# EAGLE board pannelized_eps_weather (EAGLE 7.2.0)
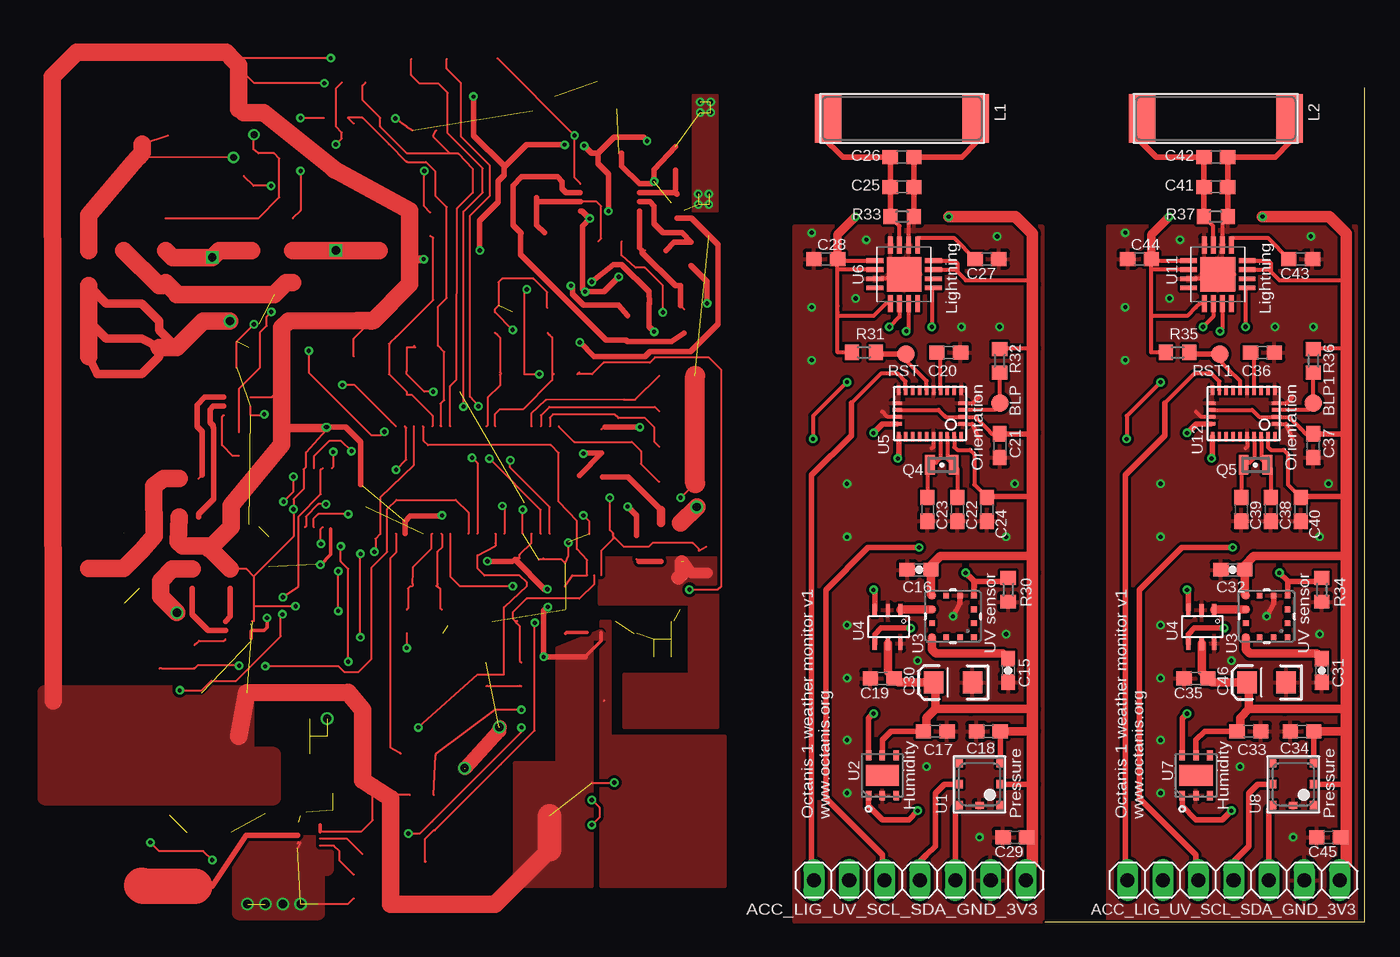
[diagram p0: board, top side]
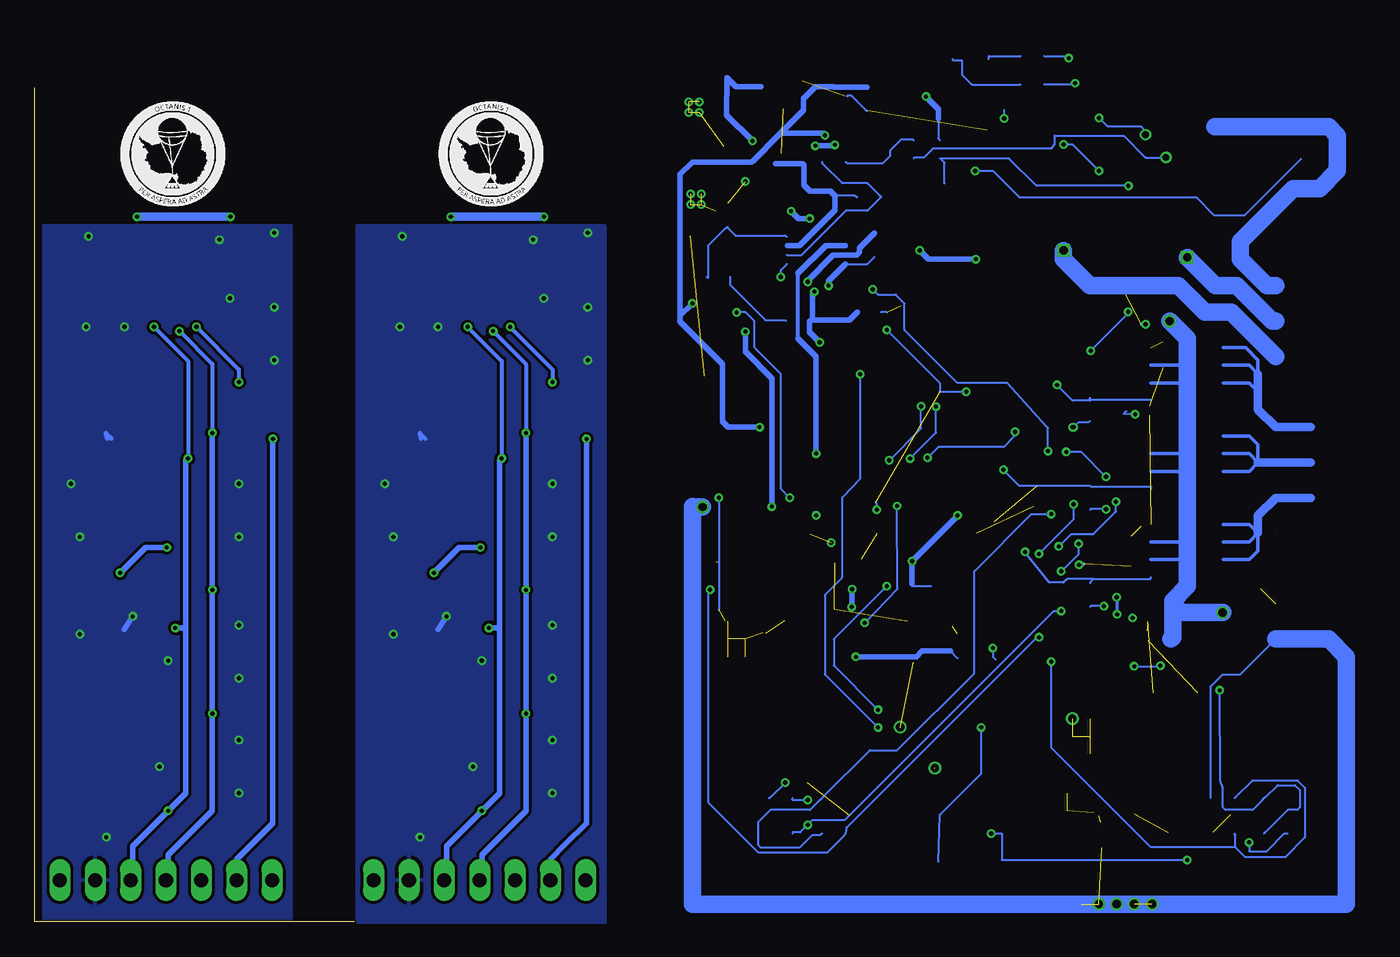
[diagram p1: board, bottom side, seen from below]

Size 23 x 59.94 mm. Coordinates in mm from the lower left corner, seen from the top.
Outline: 0.03,0 0,0 23,0 23,59.94
Copper layers (1*2*15*16): Top 0.035mm / dielectric 0.2mm / layer 2 0.0175mm / dielectric 1.1mm / layer 15 0.0175mm / dielectric 0.2mm / Bottom 0.035mm
Design rules "SeeedStudio_DRU_no_angle_20130527 *": minimum track width 6mil, minimum drill 12mil, track to track 6mil, track to pad 6mil, pad to pad 6mil, via to via 6mil, smd to smd 0mil, copper to edge 6mil, drill to drill 6mil, minimum pad ring 6mil, minimum via ring 6mil, stop-mask expansion 2mil, vias tented up to drill 25mil, thermal gap 10mil
Net classes: 0 default: clearance 0.205 mm; 1 power: width 0.203 mm, drill 0.305 mm, clearance 0.152 mm

## Footprints (pad centres in the part's own frame; a part is rotated, then mirrored left to right if it is on the bottom)
B1,27 = smd 1.27 x 1.27: TP 0,0
0603-CAP = smd 1.1 x 1: 1 -0.85,0; 2 0.85,0
C0603 = smd 1.1 x 1: 1 -0.85,0; 2 0.85,0
EIA3216 = smd 1.4 x 1.6: A 1.4,0; C -1.4,0
1X07 = drill 1.016 long: 1 -7.62,0; 2 -5.08,0; 3 -2.54,0; 4 0,0; 5 2.54,0; 6 5.08,0; 7 7.62,0
COILCRAFT = smd 1.9 x 3.5: 1 -5.3,0.05; 2 5.3,0.05
FC-12M = smd 0.7 x 1.4: 1 -0.85,0; 2 0.85,0
R0603 = smd 1 x 1.1: 1 -0.85,0; 2 0.85,0
BMP180 = smd 0.6 x 0.5: 1 1.5,1.45; 2 0,1.45; 3 -1.5,1.45; 4 -1.5,-1.45; 5 0,-1.45; 6 1.5,-1.45 | smd 0.5 x 0.6: 7 1.5,0
DFN300X300X110-7N = smd 0.711 x 0.406: 1 -1.448,0.991; 2 -1.448,0; 3 -1.448,-0.991; 4 1.448,-0.991; 5 1.448,0; 6 1.448,0.991 | smd 1.499 x 2.388: 7 0,0
ML8511 = smd 0.4 x 0.4: 1 1.5,-1.5; 2 1.5,-0.5; 3 1.5,0.5; 4 1.5,1.5; 5 0.5,1.5; 6 -0.5,1.5; 7 -1.5,1.5; 8 -1.5,0.5; 9 -1.5,-0.5; 10 -1.5,-1.5; 11 -0.5,-1.5; 12 0.5,-1.5
SOT-23-6 = smd 0.305 x 0.9: SCL 2.45,-0.45; SDA 2.45,1.95; VDD 1.5,1.95; VIN+ 0.6,-0.45; VIN- 0.6,1.95; VSS 1.5,-0.45
BNO055 = smd 0.675 x 0.25: 1 1.663,2.25; 6 -1.665,2.25; 7 -1.665,1.75; 8 -1.665,1.25; 9 -1.665,0.75; 10 -1.665,0.25; 11 -1.665,-0.25; 12 -1.665,-0.75; 13 -1.665,-1.25; 14 -1.665,-1.75; 15 -1.665,-2.25; 20 1.663,-2.25; 21 1.663,-1.75; 22 1.663,-1.25; 23 1.663,-0.75; 24 1.663,-0.25; 25 1.663,0.25; 26 1.663,0.75; 27 1.663,1.25; 28 1.663,1.75 | smd 0.25 x 0.675: 2 0.75,2.362; 3 0.25,2.362; 4 -0.25,2.362; 5 -0.75,2.362; 16 -0.75,-2.362; 17 -0.25,-2.362; 18 0.25,-2.362; 19 0.75,-2.362
16LDMLPQ = smd 1.2 x 0.35: 1 -2.1,0.975; 2 -2.1,0.325; 3 -2.1,-0.325; 4 -2.1,-0.975; 9 2.1,-0.975; 10 2.1,-0.325; 11 2.1,0.325; 12 2.1,0.975 | smd 0.35 x 1.2: 5 -0.975,-2.1; 6 -0.325,-2.1; 7 0.325,-2.1; 8 0.975,-2.1; 13 0.975,2.1; 14 0.325,2.1; 15 -0.325,2.1; 16 -0.975,2.1 | smd 2.5 x 2.5: EXP 0,0

## Placement (x,y rotation side)
BLP  PTR1B1,27  [B1,27]  -3.24,37.27 90 top  (outside the outline)
BLP1  PTR1B1,27  [B1,27]  19.3,37.27 90 top
C15  1n  [0603-CAP]  -2.63,18.07 270 top
C16  100n  [0603-CAP]  -9.03,25.31 180 top  (outside the outline)
C17  100n  [C0603]  -7.86,13.7 0 top  (outside the outline)
C18  100n  [C0603]  -4.05,13.7 180 top  (outside the outline)
C19  100n  [C0603]  -11.67,17.51 180 top  (outside the outline)
C20  100n  [C0603]  -6.89,40.93 180 top  (outside the outline)
C21  100n  [C0603]  -3.24,34.22 270 top  (outside the outline)
C22  12p  [C0603]  -6.28,29.65 270 top  (outside the outline)
C23  12p  [C0603]  -8.42,29.65 270 top  (outside the outline)
C24  120n  [C0603]  -4.15,29.65 270 top  (outside the outline)
C25  670p  [C0603]  -10.25,52.82 0 top  (outside the outline)
C26  270p  [C0603]  -10.25,54.95 0 top  (outside the outline)
C27  10u  [C0603]  -4.15,47.63 180 top  (outside the outline)
C28  1u  [C0603]  -15.73,47.63 0 top  (outside the outline)
C29  100n  [C0603]  -2.14,6.08 180 top
C30  10uF  [EIA3216]  -6.59,17.21 180 top  (outside the outline)
C31  1n  [0603-CAP]  19.91,18.07 270 top
C32  100n  [0603-CAP]  13.51,25.31 180 top
C33  100n  [C0603]  14.68,13.7 0 top
C34  100n  [C0603]  18.49,13.7 180 top
C35  100n  [C0603]  10.87,17.51 180 top
C36  100n  [C0603]  15.65,40.93 180 top
C37  100n  [C0603]  19.3,34.22 270 top
C38  12p  [C0603]  16.26,29.65 270 top
C39  12p  [C0603]  14.12,29.65 270 top
C40  120n  [C0603]  18.39,29.65 270 top
C41  670p  [C0603]  12.29,52.82 0 top
C42  270p  [C0603]  12.29,54.95 0 top
C43  10u  [C0603]  18.39,47.63 180 top
C44  1u  [C0603]  6.81,47.63 0 top
C45  100n  [C0603]  20.4,6.08 180 top
C46  10uF  [EIA3216]  15.95,17.21 180 top
JP4  [1X07]  -8.97,3 180 top
JP5  [1X07]  13.57,3 180 top
L1  100uH  [COILCRAFT]  -10.25,57.69 0 top  (outside the outline)
L2  100uH  [COILCRAFT]  12.29,57.69 0 top
Q4  32.768kHz  [FC-12M]  -7.4,32.84 0 top  (outside the outline)
Q5  32.768kHz  [FC-12M]  15.14,32.84 0 top
R30  10k  [R0603]  -2.63,23.86 270 top
R31  10k  [R0603]  -12.99,40.93 0 top  (outside the outline)
R32  10k  [R0603]  -3.24,40.32 90 top  (outside the outline)
R33  10k  [R0603]  -10.25,50.68 180 top  (outside the outline)
R34  10k  [R0603]  19.91,23.86 270 top
R35  10k  [R0603]  9.55,40.93 0 top
R36  10k  [R0603]  19.3,40.32 90 top
R37  10k  [R0603]  12.29,50.68 180 top
RST  PTR1B1,27  [B1,27]  -9.96,40.81 90 top  (outside the outline)
RST1  PTR1B1,27  [B1,27]  12.58,40.81 90 top
U1  BMP180  [BMP180]  -4.68,9.89 270 top  (outside the outline)
U2  SHT21  [DFN300X300X110-7N]  -11.67,10.53 90 top  (outside the outline)
U3  ML8511-UV-SENSORSMD  [ML8511]  -6.59,21.95 0 top  (outside the outline)
U4  MCP3425  [SOT-23-6]  -9.76,21.95 180 top  (outside the outline)
U5  BNO055A  [BNO055]  -8.24,36.54 270 top  (outside the outline)
U6  AS3935  [16LDMLPQ]  -10.1,46.54 270 top  (outside the outline)
U7  SHT21  [DFN300X300X110-7N]  10.87,10.53 90 top
U8  BMP180  [BMP180]  17.86,9.89 270 top
U9  MCP3425  [SOT-23-6]  12.78,21.95 180 top
U10  ML8511-UV-SENSORSMD  [ML8511]  15.95,21.95 0 top
U11  AS3935  [16LDMLPQ]  12.44,46.54 270 top
U12  BNO055A  [BNO055]  14.3,36.54 270 top

## Library data of the parts
BLP BLP1 RST RST1 = testpad
C15 C31 = SparkFun-Capacitors; PROD_ID: CAP-07886
C16 C32 = SparkFun-Capacitors; PROD_ID: CAP-00810
C17-C29 C33-C45 R31 R32 R35 R36 = rcl
C30 C46 = SparkFun-Retired; PROD_ID: CAP-00811
JP4 JP5 = pinhead
L1 L2 U6 U11 = AS3935
Q4 Q5 = crystal; URL: http://www.mouser.ch/ProductDetail/ECS/ECS-327-125-12-TR/?qs=sGAEpiMZZMsBj6bBr9Q9adKxTNdvE4KvM1b8HDkgjuY%3d
R30 R33 R34 R37 = resistor
U1 U8 = SparkFun-Sensors
U2 U7 = SENSIRION-SHT21; MPN: SHT21; OC_FARNELL: 1855468; OC_NEWARK: 20T1172; PACKAGE: DFN-6; SUPPLIER: SENSIRION
U3 U10 = SparkFun-Sensors; PROD_ID: IC-11927
U4 U9 = phMeter
U5 U12 = BNO055

## Nets
+3V1 [power]: C32.1 C33.1 C34.1 C35.1 C37.1 C40.1 C44.2 C45.1 C46.A JP5.1 R35.1 R36.2 U7.5 U8.2 U8.3 U9.VDD U10.7 U11.5 U11.6 U11.9 U11.15 U11.16 U12.3 U12.17 U12.28
+3V3 [power]: C16.1 C17.1 C18.1 C19.1 C21.1 C24.1 C28.2 C29.1 C30.A JP4.1 R31.1 R32.2 U1.2 U1.3 U2.5 U3.7 U4.VDD U5.3 U5.17 U5.28 U6.5 U6.6 U6.9 U6.15 U6.16
ACCEL_IRQ: JP4.7 U5.14
ACCEL_IRQ1: JP5.7 U12.14
ACCEL_N_BOOTLD: BLP.TP R32.1 U5.4
ACCEL_N_BOOTLD1: BLP1.TP R36.1 U12.4
ACCEL_N_RST: R31.2 RST.TP U5.11
ACCEL_N_RST1: R35.2 RST1.TP U12.11
GND1: C15.2 C16.2 C17.2 C18.2 C19.2 C20.1 C21.2 C22.2 C23.2 C24.2 C25.2 C26.2 C27.1 C28.1 C29.2 C30.C JP4.2 L1.2 R30.2 R33.1 U1.7 U2.2 U3.5 U4.VIN- U4.VSS U5.2 U5.5 U5.6 U5.10 U5.15 U5.16 U5.18 U5.25 U6.2 U6.4 U6.7 U6.EXP
GND2: C31.2 C32.2 C33.2 C34.2 C35.2 C36.1 C37.2 C38.2 C39.2 C40.2 C41.2 C42.2 C43.1 C44.1 C45.2 C46.C JP5.2 L2.2 R34.2 R37.1 U7.2 U8.7 U9.VIN- U9.VSS U10.5 U11.2 U11.4 U11.7 U11.EXP U12.2 U12.5 U12.6 U12.10 U12.15 U12.16 U12.18 U12.25
LIGHTNING_IRQ: JP4.6 U6.10
LIGHTNING_IRQ1: JP5.6 U11.10
N$27: C15.1 U3.10
N$36: U3.8 U4.VIN+
N$39: C25.1 C26.1 L1.1 R33.2 U6.3
N$41: C27.2 U6.1
N$42: C20.2 U5.9
N$43: C22.1 Q4.2 U5.27
N$44: C31.1 U10.10
N$46: U9.VIN+ U10.8
N$47: C41.1 C42.1 L2.1 R37.2 U11.3
N$49: C43.2 U11.1
N$51: C36.2 U12.9
N$52: C39.1 Q5.1 U12.26
N$53: C38.1 Q5.2 U12.27
N$73: C23.1 Q4.1 U5.26
SCL: JP4.4 U1.5 U2.6 U4.SCL U5.19 U6.11
SCL1: JP5.4 U7.6 U8.5 U9.SCL U11.11 U12.19
SDA: JP4.3 U1.6 U2.1 U4.SDA U5.20 U6.13
SDA1: JP5.3 U7.1 U8.6 U9.SDA U11.13 U12.20
UV_EN: JP4.5 R30.1 U3.4
UV_EN1: JP5.5 R34.1 U10.4

## Tracks (layer width: path | path; a pad name or v marks a point on that pad's centre or on a via)
+3V1  (via drill 0.3)
  Top 0.305: U12.17 14.91,36.79 15.34,36.36 15.41,36.29 | 15.41,36.29 U12.3 | U12.28 16.05,34.13 16.26,33.92 17.17,33.92 17.48,33.61 17.48,31.42 C40.1 | 21.67,49.46 21.67,45.81 | 21.67,45.81 21.67,41.23 | 21.67,41.23 21.67,35.14 21.67,30.64 21.74,30.57 | 15.41,36.29 17.55,36.29 18.39,35.44 18.76,35.07 C37.1 | R36.2 arc-90 19.37,41.23 21.67,41.23 | U11.16 16.07,47.52 16.26,47.33 16.26,46.72 | 16.26,46.72 16.87,46.11 21.36,46.11 21.67,45.81 | U11.15 16.11,46.87 16.26,46.72 | U11.5 7.78,47.52 C44.2 7.66,46.87 | U11.6 7.66,46.87 | R35.1 7.66,40.93 7.66,43.55 | 7.66,43.55 7.66,43.81 | 7.66,43.81 7.66,44.28 | 7.66,44.28 7.66,46.87 | 7.66,43.81 7.66,44.28 | U11.9 11.13,44.44 10.87,44.18 10.24,43.55 7.66,43.55
  Top 0.406: U8.2 21.67,9.89 | C45.1 21.67,6.08 | C34.1 19.34,11.43 U8.3 | U7.5 10.87,13.06 11.51,13.7 C33.1 | 21.74,30.57 18.45,30.57 C40.1 | C37.1 21.6,35.07 21.67,35.14
  Top 0.61: 21.67,13.7 C34.1 | 21.67,15.3 17.22,15.3 14.68,15.3 | 14.68,15.3 14.05,14.66 14.05,13.91 C33.1 | 14.68,15.3 14.68,17.38 C46.A 12.03,17.2 C35.1 11.28,17.95 U9.VDD | 21.67,25.08 21.74,26.22 21.67,26.3 15.04,26.3 14.36,25.62 C32.1 14.36,23.54 U10.7 | C44.2 7.66,49.4 v8.94,50.68
  Top 0.813: JP5.1 21.03,3.16 21.03,3.54 21.67,4.17 21.67,6.08 21.67,9.89 21.67,13.7 21.67,15.3 21.67,25.08 21.67,35.14 21.67,41.23 21.67,45.81 21.67,49.46 20.45,50.68 v15.65,50.68
  Bottom 0.61: v8.94,50.68 v15.65,50.68
+3V3  (via drill 0.3)
  Top 0.305: U5.17 -7.63,36.79 -7.2,36.36 -7.13,36.29 | -7.13,36.29 U5.3 | U5.28 -6.49,34.13 -6.28,33.92 -5.37,33.92 -5.06,33.61 -5.06,31.42 C24.1 | -0.87,49.46 -0.87,45.81 | -0.87,45.81 -0.87,41.23 | -0.87,41.23 -0.87,35.14 -0.87,30.64 -0.8,30.57 | -7.13,36.29 -4.99,36.29 -4.15,35.44 -3.78,35.07 C21.1 | R32.2 arc-90 -3.17,41.23 -0.87,41.23 | U6.16 -6.47,47.52 -6.28,47.33 -6.28,46.72 | -6.28,46.72 -5.67,46.11 -1.18,46.11 -0.87,45.81 | U6.15 -6.43,46.87 -6.28,46.72 | U6.5 -14.76,47.52 C28.2 -14.88,46.87 | U6.6 -14.88,46.87 | R31.1 -14.88,40.93 -14.88,43.55 | -14.88,43.55 -14.88,43.81 | -14.88,43.81 -14.88,44.28 | -14.88,44.28 -14.88,46.87 | -14.88,43.81 -14.88,44.28 | U6.9 -11.41,44.44 -11.67,44.18 -12.3,43.55 -14.88,43.55
  Top 0.406: U1.2 -0.87,9.89 | C29.1 -0.87,6.08 | C18.1 -3.2,11.43 U1.3 | U2.5 -11.67,13.06 -11.03,13.7 C17.1 | -0.8,30.57 -4.08,30.57 C24.1 | C21.1 -0.94,35.07 -0.87,35.14
  Top 0.61: -0.87,13.7 C18.1 | -0.87,15.3 -5.32,15.3 -7.86,15.3 | -7.86,15.3 -8.49,14.66 -8.49,13.91 C17.1 | -7.86,15.3 -7.86,17.38 C30.A -10.51,17.2 C19.1 -11.26,17.95 U4.VDD | -0.87,25.08 -0.8,26.22 -0.87,26.3 -7.5,26.3 -8.18,25.62 C16.1 -8.18,23.54 U3.7 | C28.2 -14.88,49.4 v-13.6,50.68
  Top 0.813: JP4.1 -1.51,3.16 -1.51,3.54 -0.87,4.17 -0.87,6.08 -0.87,9.89 -0.87,13.7 -0.87,15.3 -0.87,25.08 -0.87,35.14 -0.87,41.23 -0.87,45.81 -0.87,49.46 -2.09,50.68 v-6.89,50.68
  Bottom 0.61: v-13.6,50.68 v-6.89,50.68
A_EXT1
  Top 0.152: -34.92,35.6 -33.81,34.49 -29.67,34.49 -29.01,33.83 -29.01,32.92 -27.71,31.62
A_EXT2
  Top 0.152: -35.57,35.6 -35.56,35.61 -35.56,36.25 -35.33,36.47 -30.91,36.47 -30.63,36.2 -28.7,36.2 -28.07,35.56 -28.07,34.52 -27.71,34.16
A_EXT3
  Top 0.152: -36.22,35.6 -36.2,35.62 -36.2,36.4 -35.59,37.01 -28.02,37.01 -27.71,36.7
A_EXT4
  Top 0.152: -36.87,35.6 -36.91,35.64 -36.91,36.55 -35.87,37.49 -30.24,37.53 -29.43,37.53 -27.71,39.24
ACCEL_IRQ
  Top 0.305: U5.14 -9.99,38.85 -10.55,39.41 -11.77,39.41 -13.9,37.27
  Top 0.406: JP4.7 -16.75,3.16 -16.75,32.12 -13.9,34.96 -13.9,37.27
ACCEL_IRQ1
  Top 0.305: U12.14 12.55,38.85 11.99,39.41 10.77,39.41 8.64,37.27
  Top 0.406: JP5.7 5.79,3.16 5.79,32.12 8.64,34.96 8.64,37.27
ACCEL_N_BOOTLD
  Top 0.305: U5.4 -3.72,36.79 arc90 BLP.TP R32.1
ACCEL_N_BOOTLD1
  Top 0.305: U12.4 18.82,36.79 arc90 BLP1.TP R36.1
ACCEL_N_RST
  Top 0.305: U5.11 -8.49,38.87 -9.33,39.71 -9.96,40.34 RST.TP
  Top 0.406: R31.2 -12.02,40.81 RST.TP
ACCEL_N_RST1
  Top 0.305: U12.11 14.05,38.87 13.21,39.71 12.58,40.34 RST1.TP
  Top 0.406: R35.2 10.52,40.81 RST1.TP
BT+  (via drill 0.6)  (3 unrouted)
  Top 0.152: -53.62,5.72 -53.7,5.64 -53.47,5.71 -53.7,5.32 | -49.66,1.69 -50.08,1.27 -52.2,1.27
  Top 1.27: v-24.99,29.82 -26.16,28.65
  Bottom 0.152: -61.51,8.89 -61.51,16.93 -62.36,17.78 -63.63,17.78 -66.17,20.32
  Bottom 1.016: -66.17,20.32 -68.71,20.32
  Bottom 1.27: -66.17,20.32 -69.98,20.32 -71.25,19.05 -71.25,1.27 v-56.01,1.27 v-54.74,1.27 v-53.47,1.27 -24.26,1.27 -24.26,29.84 v-24.99,29.82
  other vias: -57.28,1.27
  pour Top: -52.2,0.64 -52.2,3.81 -51.56,3.81 -51.56,5.71 -56.64,5.71 -57.91,4.45 -57.91,0.64
BT_CHG  (1 unrouted)
  Top 0.762: -24.23,25.07 -25.38,25.07 -25.96,25.91
  Top 1.016: -26.09,25.86 -26.09,24.97 -26.31,24.74
  pour Top: -30.23,13.97 -30.23,17.78 -25.53,17.78 -25.53,22.86 -32,22.86 -32,26.16 -23.5,26.16 -23.5,13.97
CHG_CMD
  Top 0.152: -33.43,51.82 -33.35,51.74 -32.19,51.74 -31.88,51.44 -31.88,49.11 -32.09,48.9
  Top 0.406: -35.96,49.53 -36.51,50.09 -36.51,51.82 | -36.51,51.82 -36.51,52.05 | -36.51,51.82 -36.44,51.74 -33.35,51.74
DISSIP  (via drill 0.5)
  Top 0.152: -62.99,56.52 -64.86,55.88 | v-58.29,54.94 -64.41,54.97 -64.76,54.55 -65.49,54.55
  Top 1.27: -64.86,55.88 -64.86,55.28 -65.49,54.55 -68.71,50.8 -68.71,48.26
  Bottom 0.152: v-58.29,54.94 -56.82,54.94 -55.27,56.49 -50.29,56.52 -50.29,55.88 -50.05,55.58 -41.53,55.58 -40.89,54.94 -40.21,54.94 -40.15,54.87
EN_CHG
  Top 0.152: -44.67,35.6 -44.63,35.56 -44.63,34.57 -44.32,34.27 -35.48,34.27 -34.93,33.71 -34.93,30.2 -33.6,28.83 -33.6,26.8 -32.88,25.99 -32.88,24.91 -33.93,24.91 -34.47,24.09
EN_EXT1  (via drill 0.3)
  Top 0.152: -45.32,35.6 -45.31,35.6 -45.31,32.82 -47.75,30.5 -47.75,27.86 -48.08,27.53 -48.08,26.67 v-48.16,26.59
  Bottom 0.152: -53.09,24.66 -57.2,24.66 -57.22,24.77 | -53.09,24.66 -52.91,24.48 -52.83,24.34 | -53.09,24.66 -51.2,24.66 -50.93,24.38 -49.91,24.38 v-48.16,26.59
EN_EXT2  (via drill 0.3)
  Top 0.152: v-46.61,32.49 -45.87,33.22 -45.87,35.51 -45.97,35.6
  Bottom 0.152: -57.22,31.11 -57.2,31.27 -52.91,31.27 -52.83,31.33 -47.77,31.33 v-46.61,32.49
EN_EXT3  (via drill 0.3 pad 0.25)
  Top 0.152: -46.62,35.6 -46.94,35.92 -49.6,38.58 v-50.47,38.58 -50.44,38.61
  Bottom 0.152: -57.22,37.47 -57.2,37.53 -52.91,37.53 -52.83,37.68 -52.83,37.47 -51.56,37.47 -50.47,38.56 v-50.47,38.58
EN_HEAT1
  Top 0.152: -48.81,60.33 -49.02,60.11 -49.02,59.05 -47.75,57.78 -47.75,57.15 -45.85,55.24 -42.77,55.24 | -43.73,56.9 -43.94,56.52 -43.94,56.41 -42.77,55.24 | -42.72,35.6 -42.72,35.61 -42.72,38.5 -42.26,38.96 -42.22,51.28 -41.1,52.4 -41.1,54.13 -42.13,55.21 arc90 -42.17,55.24 -42.77,55.24
EN_HEAT2
  Top 0.152: -49.66,57.37 -50.08,57.78 -49.02,57.78 -47.12,55.88 -45.85,54.61 -45.82,54.63 -45.8,54.61 -44.45,54.61 -43.79,53.95 -43.79,52.2 -42.98,51.38 -42.98,44.83 -43.6,44.21 -43.6,41.4 -43.16,40.96 -43.16,37.49 -43.41,37.24 -43.41,35.64 -43.37,35.6
EN_HEAT3
  Top 0.152: -44.02,35.6 -43.99,35.62 -43.99,36.37 -45.51,37.88 -45.85,37.88 -45.85,38.1 -47.12,39.37 -47.12,41.53 -46.99,41.66 -46.61,42.04 -43.94,44.7 -43.94,49.16 -44.15,49.29
EXT1+
  Bottom 0.254: -62.42,27.3 -64.26,27.3 -64.9,27.94 | -62.42,28.57 -64.26,28.57 -64.9,27.94 | -62.42,26.04 -64.26,26.04 -64.9,26.67 -64.9,27.94
  Bottom 0.61: -68.71,30.48 -66.17,30.48 -64.9,29.21 -64.9,27.94
EXT2+
  Bottom 0.254: -62.42,32.38 -64.26,32.38 -64.9,33.02 | -62.42,33.66 -64.26,33.66 -64.9,33.02 | -62.42,34.92 -64.26,34.92 -64.9,34.29 -64.9,33.02
  Bottom 0.61: -68.71,33.02 -66.17,33.02 -64.9,33.02
EXT3+
  Bottom 0.254: -62.42,38.73 -64.26,38.73 -64.9,38.1 | -62.42,40.01 -64.26,40.01 -64.9,39.37 -64.9,40.39 -64.01,41.27 -62.42,41.27
  Bottom 0.61: -68.71,35.56 -66.17,35.56 -64.9,36.83 -64.9,38.1 -64.9,39.37
EXT_PW  (via drill 0.6)
  Top 0.152: -61.84,21.98 v-62.36,22.23
  Top 0.61: -68.71,45.72 -67.44,44.45 -64.9,44.45 -63.63,43.18 -63.63,42.55 -62.36,41.27 | -68.71,43.18 -67.44,41.91 -64.9,41.91 -63.63,41.27 -63.63,40.64 -64.9,39.37 -68.07,39.37 -68.71,40.64
  Top 1.27: -62.51,22.38 v-62.36,22.23 -63.53,23.39 -63.53,24.51 -62.69,25.35 -61.27,25.35 | -68.71,40.64 -68.71,43.18 -68.71,45.72 | -63.63,41.27 -62.36,41.27 -60.45,43.18 v-58.55,43.18
  Bottom 0.254: -57.22,26.04 -59.18,26.04 -59.82,26.67 -59.18,27.3 -57.22,27.3 | -57.22,32.38 -59.18,32.38 -59.82,31.75 | -57.22,33.66 -59.18,33.66 -59.82,34.29 | -57.22,38.73 -59.18,38.73 -59.82,38.1 | -57.22,40.01 -59.18,40.01 -59.82,39.37
  Bottom 1.27: -58.76,22.86 -58.76,20.43 -58.65,20.32 | -58.76,22.86 -58.76,23.07 -59.82,24.13 -59.82,26.67 -59.82,31.75 -59.82,34.29 -59.82,38.1 -59.82,39.37 -59.82,41.91 v-58.55,43.18 | v-62.36,22.23 -59.4,22.23 -58.76,22.86
GND  (via drill 0.3, 0.3 pad 0.25, 0.6)  (32 unrouted)
  Top 0.152: -32.73,27.94 -32.72,27.88 -32.72,28.78 v-33.15,29.21 | v-38.23,42.55 -39.5,43.81 -39.5,44.03 -39.24,44.28 -39.24,45.97 -38.99,46.23 -36.73,46.23 -35.75,45.25 -35.75,44.14 | -30.39,55.24 -30.61,55.24 | -29.13,53.04 -29.09,53.09 | -45.85,20.74 v-45.85,19.68 | -45.3,41.4 -45.21,41.27 -45.85,41.27 -45.85,39.59 -45.85,39.37 -44.58,38.1 v-43.94,38.1 | -45.43,56.9 -45.85,57.15 v-46.66,57.73 | -37.52,27.9 v-37.52,29.62 | -57.09,37.06 -57.09,36.41 -56.15,36.41 v-56.08,36.47 | -58.08,39.83 -58.08,41.7 v-56.82,42.95 | v-34.24,27.25 -34.24,26.3 -34.47,25.79 -34.71,26.04 -36.36,26.04 -36.02,26.12 | -25.12,31.52 v-26.16,30.48
  Top 0.254: -57.02,20.37 -57.02,20.9 -56.96,20.95 -56.08,20.95 -55.88,21.16 v-55.88,21.84 | -51.3,28.23 -51.3,26.4 v-52.05,25.65
  Top 0.406: -30.39,55.24 -30.39,54.31 -29.13,53.04 -28.24,53.04 v-28.07,53.21 -28.07,54.06 -26.54,55.71
  Top 1.016: -41.66,11.05 -39.19,13.72 -39.17,13.99
  Top 1.27: -54.03,45.95 -54.51,45.95 -55.37,45.09 -62.36,45.09 -62.36,45.14 -63.17,45.95 -63.4,45.72 -63.63,45.72 -66.17,48.26
  Top 1.422: -25.12,31.52 -25.12,39.24
  Bottom 0.152: -38.23,43.81 -37.81,43.81 | v-45.85,19.68 -45.85,19.05 -46.04,18.86 | v-43.94,38.1 -42.04,38.1 -42.04,38.73 v-38.23,42.55 | v-37.52,29.62 -37.52,30.02 -37.41,30.12 -37.41,30.15 | v-56.82,42.95 -56.49,42.95 -56.46,42.93 | v-56.08,36.47 -55.25,36.5 -55.45,36.7 | v-46.66,57.73 -46.66,58.37 | -35.37,59.33 -35.37,59.37 -35.69,59.37 -36.64,58.42 -36.81,58.28 | v-26.16,30.48 -26.16,22.44
  Bottom 0.254: v-55.88,21.84 -55.88,22.02 -55.86,22.05 | v-52.05,25.65 -52.32,25.65 -52.4,25.73
  other vias: -24.89,51.56 -24.13,51.56 -24.89,52.32 -24.13,52.32 -24.77,58.17 -24,58.17 -24.77,58.93 -24,58.93 -51.56,14.61 -41.68,11.05 -39.19,14
  pour Top: -25.27,51.05 -25.27,59.44 -23.5,59.44 -23.5,51.05
GND1  (via drill 0.3)
  Top 0.305: R33.1 -9.78,50.3 U6.2 | U6.EXP -10.43,46.22 U6.7 | U5.2 -5.2,35.79 -4.76,34.73 | U5.25 -7.99,34.14 -8.11,34.02 | U5.5 -5.15,37.29 -4.76,37.68 | U5.18 -11.29,36.29 -11.67,36.66
  Top 0.406: U3.5 -6.09,22.88 v-6.59,21.95 | C26.2 C25.2 | C25.2 R33.1 | C25.2 C26.2 | L1.2 -4.95,55.98 -5.95,54.98 -9.37,54.98 C26.2
  Bottom 0.305: -4.76,34.73 -4.66,35.14 -5.06,34.73
  Bottom 0.406: v-6.59,21.95 -5.97,21
  other vias: -2.78,20.68 -12.81,49.03 -5.98,42.76 -3.24,42.76 -16.75,40.37 -16.75,44.18 -16.75,49.53 -14.21,21.32 -14.21,17.51 -14.21,13.06 -14.21,9.26 -8.49,11.16 -14.21,31.48 -14.21,27.67 -2.78,27.67 -2.14,31.48 -3.41,49.26 -13.57,44.81 -4.68,6.08 -9.13,18.78
  pour Bottom: -17.97,0 -17.97,50 -0.17,50 -0.17,0
  pour Top: -17.97,0 -17.97,50 -0.17,50 -0.17,0
GND2  (via drill 0.3)
  Top 0.305: R37.1 12.76,50.3 U11.2 | U11.EXP 12.11,46.22 U11.7 | U12.2 17.34,35.79 17.78,34.73 | U12.25 14.55,34.14 14.43,34.02 | U12.5 17.39,37.29 17.78,37.68 | U12.18 11.25,36.29 10.87,36.66
  Top 0.406: U10.5 16.45,22.88 v15.95,21.95 | C42.2 C41.2 | C41.2 R37.1 | C41.2 C42.2 | L2.2 17.59,55.98 16.59,54.98 13.17,54.98 C42.2
  Bottom 0.305: 17.78,34.73 17.88,35.14 17.48,34.73
  Bottom 0.406: v15.95,21.95 16.57,21
  other vias: 19.76,20.68 9.73,49.03 16.56,42.76 19.3,42.76 5.79,40.37 5.79,44.18 5.79,49.53 8.33,21.32 8.33,17.51 8.33,13.06 8.33,9.26 14.05,11.16 8.33,31.48 8.33,27.67 19.76,27.67 20.4,31.48 19.13,49.26 8.97,44.81 17.86,6.08 13.41,18.78
  pour Bottom: 4.57,0 4.57,50 22.37,50 22.37,0
  pour Top: 4.57,0 4.57,50 22.37,50 22.37,0
HEAT1  (via drill 0.6)
  Top 1.27: -54.03,48.26 v-50.93,48.26 -47.83,48.26
  Bottom 1.27: -66.17,40.64 -62.99,43.81 -61.09,43.81 -59.18,45.72 -52.83,45.72 -50.93,47.62 v-50.93,48.26
HEAT2  (via drill 0.6)
  Top 1.27: -63.17,48.26 -62.66,47.75 v-59.82,47.75 -59.31,48.26 -56.97,48.26
  Bottom 1.27: -66.17,43.18 -65.91,43.18 -63.37,45.72 -61.85,45.72 v-59.82,47.75
HEAT3
  Bottom 1.27: -66.17,45.72 -65.53,45.72 -63.63,47.62 -63.63,48.9 -67.44,52.7 -69.34,52.7 -70.61,53.98 -70.61,56.52 -69.98,57.15 -68,57.15 -61.8,57.15
I2C_SCL  (via drill 0.3)
  Top 0.152: v-36.65,21.49 -36.65,13.76 -39.09,11.31 -43.83,6.58 -43.92,6.58 -44.51,5.99 -44.51,4.29 -44.48,4.32 | v-38.97,29.89 -38.82,29.73 -38.82,27.9
  Bottom 0.152: v-36.65,21.49 -39,23.94 v-38.97,29.89
I2C_SDA  (via drill 0.3)
  Top 0.152: v-45.01,13.97 -40.77,17.78 -38.86,17.78 -38.86,22.61 -37.21,24.13 -37.21,24.38 -37.72,24.89 -40.26,24.89 -40.77,25.4 -40.77,26.34 -39.47,27.03 -39.47,27.21 -39.47,27.9
  Bottom 0.152: -41.94,4.32 -42.04,7.7 -45.01,10.67 v-45.01,13.97
I_EXT_PW  (via drill 0.3)
  Top 0.152: -63.63,18.2 -63.45,18.23 -61.13,18.23 -61.09,18.2 -60.87,18.41 v-57.89,18.41 | -41.42,27.9 -41.4,27.91 -41.4,29.41 -42.32,30.33 -46.58,30.33 -47.24,29.67 -47.24,26.59 -48.39,25.45 -48.39,18.87 -49.33,17.93 -50.32,17.93 -50.75,18.36 v-56.01,18.36
  Bottom 0.152: v-56.01,18.36 -57.84,18.36 v-57.89,18.41
I_SC  (via drill 0.3, 0.3 pad 0.25)
  Top 0.152: v-41.15,33.35 -40.77,32.97 -40.77,27.9 | -57.89,35.19 -57.89,38.32 -56.38,39.83 -56.38,42.38 -55.91,42.85 -55.91,43.51 v-55.58,43.84 | v-52.88,41.05 -52.88,39.47 -48.41,35 -47.68,35 v-47.45,35.23
  Bottom 0.152: v-47.45,35.23 -47.45,34.95 -46.63,34.14 -41.94,34.14 v-41.15,33.35 | v-55.58,43.84 -55.58,43.74 v-52.88,41.05
LIGHTNING_IRQ  (via drill 0.3)
  Top 0.305: U6.10 -10.43,43.49 v-11.16,42.76 | v-14.21,38.8 -16.65,36.36 v-16.65,34.71
  Bottom 0.305: v-11.16,42.76 -14.21,39.71 v-14.21,38.8 | v-16.65,34.71 -16.65,29.65
  Bottom 0.406: JP4.6 -14.05,4.5 -15.12,5.57 -16.65,7.1 -16.65,29.65 v-16.65,34.71 -16.65,30.87
LIGHTNING_IRQ1  (via drill 0.3)
  Top 0.305: U11.10 12.11,43.49 v11.38,42.76 | v8.33,38.8 5.89,36.36 v5.89,34.71
  Bottom 0.305: v11.38,42.76 8.33,39.71 v8.33,38.8 | v5.89,34.71 5.89,29.65
  Bottom 0.406: JP5.6 8.49,4.5 7.42,5.57 5.89,7.1 5.89,29.65 v5.89,34.71 5.89,30.87
N$1
  Top 0.152: -58.86,20.3 -58.98,20.19 -60.77,20.19 -60.95,20.01 -61.09,19.9
N$2
  Top 0.152: -57.89,33.49 -58.33,33.49 -59.11,34.27 -59.11,36.29 -58.99,36.41
N$3
  Top 0.254: -32.88,20.81 -34.35,20.81 -34.42,20.74
N$4
  Top 0.152: -37.59,16.93 -37.72,16.98 -40.04,16.98 -40.13,16.93
N$5  (via drill 0.3)
  Top 0.152: -29.97,43.56 -29.97,43.4
  Top 0.406: -29.97,43.56 -30.61,44.32 -31.17,44.32 -32.82,44.32 -33.12,44.32 -33.91,45.11 -33.91,45.59 v-34.04,45.72
  Bottom 0.152: -37.34,47.79 -36.83,47.28 -35.26,47.28 -35.22,47.24
  Bottom 0.406: v-34.04,45.72 -34.04,46.06 -35.26,47.28
N$6
  Top 0.152: -26.42,52.28 -26.54,52.67
  Top 0.406: -26.54,52.67 -26.54,54.01 | -26.42,52.28 -26.53,52.39 -29.13,52.39
N$7
  Top 0.406: -29.13,51.74 -28.38,51.74 -28.07,51.44 -28.07,50.16 -27.43,49.53 -26.07,49.53 -25.4,48.86 -26.62,48.86 -27.22,48.26
N$8
  Top 0.152: -32.38,24.91 -32.36,24.84 -32.36,24.3 -33.43,23.23 -37.22,23.23 -38.23,22.23 -38.23,21.8 -38.01,21.59 | -37.9,21.62 -38.01,21.59 | -37.59,18.63 -37.72,18.76 -37.72,21.27 -37.9,21.44 -38.01,21.59
N$9
  Top 0.152: -29.13,48.47 -28.92,48.26 -28.7,48.26 | -25.91,44.03 -26.16,44.28
  Top 0.406: -29.13,48.47 -29.13,51.09 | -26.16,44.28 -26.16,45.72 -26.54,45.72 -28.92,48.09 -28.92,48.26
N$10  (via drill 0.3)
  Top 0.152: v-64.26,5.71 -63.63,5.08 -60.45,5.08 v-59.82,4.45 | v-36.32,39.37 -37.38,39.37 -37.38,45.3 v-37.21,45.47 | v-49.81,33.83 -50.55,34.54 -51.44,34.54 -52.52,33.46 -52.52,32.59 | v-45.72,6.35 -44.88,6.35 -44.02,7.21 -37.59,13.64 v-37.59,13.97
  Bottom 0.152: v-64.26,5.71 -64.26,5.08 -65.53,5.08 -66.8,6.35 -67.02,6.35 | v-59.82,4.45 -46.48,4.45 -46.48,6.35 v-45.72,6.35 | v-37.59,13.97 -33.78,17.78 -33.78,23.5 -35.03,24.77 -35.03,30.5 -36.32,31.85 v-36.32,39.37 | v-37.21,45.47 -37.59,45.09 -38.86,45.09 -39.5,44.45 -39.5,42.55 -43.31,38.73 -46.89,38.73 -49.71,35.61 -49.81,35.51 v-49.81,33.83
N$11
  Top 0.406: -25.91,42.33 -26.8,41.7 -29.97,41.7 -30.09,41.81 -31.52,41.81 -31.66,41.95 -34.52,44.81 -37.66,47.94 -37.66,49.53 | -37.62,49.49 -37.66,49.53 | -37.66,49.53 -38.21,50.09 -38.21,52.05 -38.21,52.92 -37.59,53.54 -35,53.54 -34.67,53.21 -34.67,52.7 -34.39,52.43 -33.39,52.43
N$12  (via drill 0.3)
  Top 0.152: -33.43,39.49 -33.57,39.37 -32.51,39.37 -31.7,40.18 -28.37,40.18 -28.37,40.21 -28.02,40.56 -24.13,40.56 -23.24,39.67 -23.24,24.13 -23.5,23.88 v-25.53,23.88 | v-51.66,30.02 -52.19,30.02 -53.09,29.13 -53.09,28.41 -53.17,28.37 | v-49.17,20.45 -49.17,26.43 v-49.16,26.45
  Bottom 0.152: v-51.66,30.02 -51.66,28.95 v-49.16,26.45 | v-25.53,23.88 -25.39,23.76 -25.39,8.58 -28.96,5 -33.97,5 -35.22,6.25 -35.27,6.35 -35.32,6.76 -49.08,20.52 -49.1,20.52 v-49.17,20.45
N$13  (via drill 0.3)
  Top 0.152: v-50.05,29.31 -52.19,29.31 -52.55,28.95 -52.55,28.41 -52.52,28.37
  Bottom 0.152: -33.57,6.35 -33.43,6.25 -32.89,6.25 -32,5.36 -29.14,5.36 -28.96,5.54 -28.96,7.15 -29.86,8.04 -32.72,8.04 -33.43,8.76 -33.57,8.89 -33.61,8.94 -37,12.33 -38.97,12.33 -44.51,17.87 -44.51,25.2 -48.62,29.31 v-50.05,29.31
N$14  (via drill 0.3)
  Top 0.152: v-32.54,6.97 -32,7.5 -32,8.22 v-32.54,8.76 | v-52.02,27.16 -52.02,28.23 -51.87,28.37 | v-50.76,22.34 v-50.76,25.2
  Bottom 0.152: v-32.54,8.76 -31.46,8.76 -31.46,8.89 | -31.46,6.35 -31.46,6.43 -32,6.43 v-32.54,6.97 -32.89,7.33 -35.22,7.33 -50.23,22.34 v-50.76,22.34 | v-52.02,27.16 -52.02,26.45 v-50.76,25.2
N$15  (via drill 0.3)
  Top 0.152: v-54.74,23.33 -53.62,24.12 -53.62,29.13 -52.02,30.74 -52.02,32.52 -51.87,32.59 | v-62.15,16.64 -62.2,16.62 -60.59,16.62 -59.88,17.33 -58.09,17.33 -54.9,20.53 -54.9,21.97 v-54.77,22.1
  Bottom 0.152: -65.32,6.35 -65.42,6.43 -67.03,8.04 -67.74,8.04 -67.92,8.22 -67.92,9.47 -67.56,9.83 -66.31,9.83 -65.42,8.94 -65.32,8.89 -65.24,8.76 -64.52,8.04 -62.56,8.04 -62.38,8.22 -62.38,9.65 -62.18,10.13 v-62.15,16.64
  Bottom 0.203: v-54.74,23.33 -54.74,22.13 v-54.77,22.1
N$16  (via drill 0.3)
  Top 0.152: v-51.12,33.77 -51.12,32.7 -51.22,32.59 | v-53.98,31.99 -53.98,30.91 v-54.7,30.2 | v-50.59,26.98 -50.59,25.91 -50.05,25.38 v-50.05,18.71
  Bottom 0.152: -63.27,5.36 -63.27,6.25 -63.21,6.35 | -63.27,5.36 -63.99,4.65 -66.85,4.65 -68.28,6.08 -68.28,9.65 -67.74,10.19 -64.52,10.19 -63.27,8.94 -63.21,8.89 | v-51.12,33.77 -52.19,33.77 v-53.98,31.99 | v-54.7,30.2 -54.7,29.48 -53.09,27.88 -51.48,27.88 v-50.59,26.98 | v-50.05,18.71 -50.05,12.51 -57.2,5.36 -63.27,5.36
N$17  (via drill 0.3)
  Top 0.406: -29.34,27.77 -29.34,29.21 v-29.97,29.84 | v-32.54,46 -30.99,47.24 -30.4,47.24 -28.45,45.3 -28.41,44.44 -28.42,44.42 -28.42,42.77 v-28.07,42.42
  Bottom 0.406: v-29.97,29.84 -29.97,39.04 -28.07,40.97 v-28.07,42.42 | v-32.54,46 -32.56,46.08 -34.34,47.9 -35.23,47.9 -35.26,47.93 -36.07,47.93 -36.27,48.13 -36.27,48.42 -37.34,49.49
N$18
  Bottom 0.152: -30.98,43.18 -30.93,43.24 -29.5,43.24 -27,45.75 -26.99,46.35
N$19
  Bottom 0.152: -25.29,46.35 -25.36,46.28 -25.39,48.61 -26.64,49.86 -26.8,49.95 -26.82,49.86 -27.35,49.32 -30.93,49.32 -31.04,49.23
N$20
  Bottom 0.152: -34.5,52.18 -35.93,52.18 -36.11,52.07 | -30.21,54.5 -30.19,54.61 | -31.11,48.61 -31.04,48.58
  Bottom 0.406: -30.21,54.5 -32.18,54.5 -32.28,54.4 -32.28,52.93 -32.72,52.5 -34.18,52.5 -34.5,52.18 -34.5,51.16 -31.95,48.62 -31.12,48.62 -31.11,48.61
N$21
  Bottom 0.152: -33.57,54.61 -33.61,54.5 -35.04,53.07 -36.83,53.07 -37.72,52.18 -37.81,52.07 -37.72,52 -36.83,51.11 -35.28,51.11 -32.11,47.93 -31.04,47.93
N$22
  Bottom 0.152: -35.27,54.61 -35.4,54.5 -37.92,54.5 -38.48,55.07 -38.48,55.45 -39.27,56.24 -40.09,56.24 -40.15,56.17
N$23  (via drill 0.3)
  Top 0.152: -31.03,27.94 -31.03,27.52 -31.88,26.67 -31.88,24.91 | -24.33,26.96 -24.85,26.67 -24.85,26.81 -25.27,27.23 -28.19,27.23 -28.47,26.95 -30.23,26.95 -31.03,27.75 -31.03,27.94 | -31.03,27.85 -31.03,27.94 | -31.03,27.94 -31.24,28.16 v-31.24,30.48 | v-27.43,43.81 -27.43,45.72 -28.73,47.02 -29.39,47.02 -30.42,47.92 -30.39,48.9
  Bottom 0.152: v-31.24,30.48 -30.61,31.11 -30.61,39.37 -28.7,41.27 -28.7,43.18 -28.07,43.81 v-27.43,43.81
N$24
  Top 0.152: -31.69,15.88 -31.64,15.9 -31.66,15.91
  pour Top: -31.88,21.59 -31.88,2.54 -22.99,2.54 -22.99,13.34 -31.24,13.34 -31.24,21.59
N$25
  Top 0.152: -49.02,4.87 -50.14,5.98 -52.07,5.98
N$26
  Top 0.406: -61.09,2.54 -59.82,2.54 -57.39,6.24 -53.7,6.24
  Top 2.54: -61.09,2.54 -64.79,2.54 -64.9,2.65
N$27
  Top 0.61: U3.10 -8.09,19.57 -7.81,19.29 -2.99,19.29 C15.1
N$28  (via drill 0.3)
  Top 0.152: -33.43,32.09 -33.49,31.95 | -33.19,33.69 v-33.15,33.66
  Top 0.406: -33.43,32.09 -31.85,33.69 -33.19,33.69
  Bottom 0.305: -31.83,41.91 -31.83,46.61
  Bottom 0.406: v-33.15,33.66 -33.15,40.64 -31.83,41.91 | -31.83,46.61 -33.85,48.58 -35.26,48.58
N$29  (via drill 0.3)
  Top 0.152: v-50.93,55.88 -50.51,56.3 -50.51,56.73 -50.93,57.15 -50.93,59.91 -50.51,60.33 | v-53.47,53.98 -53.47,51.13 -54.03,50.57
  Bottom 0.152: v-50.93,55.88 -51.56,55.88 v-53.47,53.98
N$30
  Top 0.152: -49.66,3.39 -50.67,4.41 -50.67,5.08 -51.08,5.48 -52.07,5.48
N$31  (via drill 0.3, 0.5)
  Top 0.152: -63.17,50.57 -56.49,50.57 -54.99,52.07 -54.99,54.86 -55.37,55.24 -56.52,55.24 -56.86,55.52 -56.86,56.52 v-56.82,56.57 | v-53.47,57.78 -51.78,57.78
  Bottom 0.152: v-53.47,57.78 -54.08,57.17 -56.46,57.17 -56.82,56.82 v-56.82,56.57
N$32
  Top 0.406: -58.52,23.95 -58.52,21.95 -58.86,21.61
N$33
  Top 0.406: -61.27,23.95 -61.27,22.11 -60.12,20.95 -58.86,20.95
N$34
  Top 0.152: -60.53,32.13 -60.81,31.85
  Top 0.406: -58.99,37.71 -60.36,37.71 -60.91,37.16 -60.91,35.61 -60.53,35.23 -60.53,32.13
N$35
  Top 0.406: -60.81,29.1 -60.81,29.31 -59.72,30.4 -59.72,35.51 -59.74,35.53 -59.74,35.66 -59.97,35.89 -59.97,36.83 -59.74,37.06 -58.99,37.06
N$36
  Top 0.61: U3.8 -10.31,22.45 U4.VIN+
N$37  (via drill 0.3)
  Top 0.152: -44.15,50.99 -44.58,51.42 v-44.58,53.98
  Bottom 0.152: v-44.58,53.98 -45.85,53.98 -47.75,52.07 -60.45,52.07 -61.72,50.8 -63.96,50.8 -68,54.84
N$38
  Top 0.152: -29.16,25.9 -29.34,26.07
  Top 0.406: -27.56,25.9 -29.16,25.9
N$39
  Top 0.305: U6.3 -10.43,50.01 R33.2
  Top 0.406: R33.2 C25.1 | C25.1 C26.1 | C26.1 -14.51,54.95 -16.04,56.47 -16.04,57.25 L1.1 | C25.1 C26.1
N$40
  Top 0.152: -31.76,31.98 -31.79,31.95
  Top 0.406: -27.56,29.59 -29.95,31.98 -31.76,31.98
  Top 0.61: -27.56,28.65 -27.56,29.59
N$41
  Top 0.305: U6.1 -9.13,49.16 -7.81,49.16 -6.52,49.16 C27.2
N$42
  Top 0.305: U5.9 -7.49,40.93 C20.2
N$43
  Top 0.305: U5.27 -6.99,33.28 Q4.2 -6.28,32.57 C22.1
N$44
  Top 0.61: U10.10 14.45,19.57 14.73,19.29 19.55,19.29 C31.1
N$45  (via drill 0.3)
  Top 0.152: -57.55,53.59 -57.56,53.6 -56.85,52.9 v-55.59,52.9
  Bottom 0.152: v-55.59,52.9 -48.98,52.9 -47.01,54.86 -42.06,54.86 -42.05,54.87 -42.37,54.55 -42.37,53.06
N$46
  Top 0.61: U10.8 12.23,22.45 U9.VIN+
N$47
  Top 0.305: U11.3 12.11,50.01 R37.2
  Top 0.406: R37.2 C41.1 | C41.1 C42.1 | C42.1 8.03,54.95 6.5,56.47 6.5,57.25 L2.1 | C41.1 C42.1
N$48
  Top 0.152: -45.85,22.44 -45.76,22.52 -45.76,23.95 -45.58,24.12 -45.43,24.13 -45.4,24.3 -45.39,25.15 -45.39,25.5 -44.07,26.82 -44.07,27.85 -44.02,27.9
N$49
  Top 0.305: U11.1 13.41,49.16 14.73,49.16 16.02,49.16 C43.2
N$50
  Top 0.152: -43.31,22.44 -43.44,22.52 -43.44,23.95 -43.62,24.12 -43.73,24.13 -43.62,24.3 -43.62,26.62 -43.28,26.95 -43.28,27.82 -43.37,27.9
N$51
  Top 0.305: U12.9 15.05,40.93 C36.2
N$52
  Top 0.305: U12.26 15.05,33.32 14.73,33 14.46,33 Q5.1 14.12,32.67 C39.1
N$53
  Top 0.305: U12.27 15.55,33.28 Q5.2 16.26,32.57 C38.1
N$73
  Top 0.305: U5.26 -7.49,33.32 -7.81,33 -8.08,33 Q4.1 -8.42,32.67 C23.1
RST/SBWTDIO  (via drill 0.3)
  Top 0.152: v-37.59,15.24 -39.5,15.24 -43.74,12.09 -43.75,11.98 -43.91,9.12 | v-38.23,24.13 -42.04,24.13 -42.7,24.79 -42.7,27.88 -42.72,27.9
  Bottom 0.152: v-38.23,24.13 -34.42,20.32 -34.42,18.41 v-37.59,15.24
S$1  (2 unrouted)
S$2  (1 unrouted)
S$8  (1 unrouted)
S$9  (1 unrouted)
S$13  (1 unrouted)
S$15  (1 unrouted)
S$16  (1 unrouted)
S$17  (1 unrouted)
S$18  (1 unrouted)
S$19  (1 unrouted)
S$20  (1 unrouted)
S$21  (1 unrouted)
S$22  (1 unrouted)
S$23  (5 unrouted)
SC+
  Top 1.27: -68.71,25.4 -66.17,25.4 -64.87,26.7 -63.98,27.74 -64.01,31.32 -63.32,31.85 -62.21,31.85
SCL  (via drill 0.3)
  Top 0.305: U6.11 -9.78,42.62 v-9.94,42.45
  Top 0.406: U2.6 -12.66,14.61 v-12.3,14.97 | U1.5 -7.22,9.89 -7.86,9.26 -7.86,6.08 -7.86,5.45 -8.49,4.81 -9.13,4.17 -9.13,3.16 JP4.4 | U4.SCL -12.21,23.77 v-12.3,23.86 | U5.19 -11.65,35.79 v-12.3,35.14
  Bottom 0.305: v-9.94,42.45 -12.3,40.09 v-12.3,35.14
  Bottom 0.406: JP4.4 -9.13,3.16 -9.13,4.81 -12.3,7.99 v-12.3,14.97 | v-12.3,14.97 -12.3,15.61 | -12.3,15.61 -12.3,20.68 v-12.3,23.86 | v-12.3,23.86 -12.3,24.47 | -12.3,24.47 -12.3,32.39 | -12.3,32.39 v-12.3,35.14 | v-12.3,35.14 -12.3,35.29 | v-12.3,14.97 -12.3,15.61 | v-12.3,23.86 -12.3,24.47 | v-12.3,35.14 -12.3,32.39
SCL1  (via drill 0.3)
  Top 0.305: U11.11 12.76,42.62 v12.6,42.45
  Top 0.406: U7.6 9.88,14.61 v10.24,14.97 | U8.5 15.32,9.89 14.68,9.26 14.68,6.08 14.68,5.45 14.05,4.81 13.41,4.17 13.41,3.16 JP5.4 | U9.SCL 10.33,23.77 v10.24,23.86 | U12.19 10.89,35.79 v10.24,35.14
  Bottom 0.305: v12.6,42.45 10.24,40.09 v10.24,35.14
  Bottom 0.406: JP5.4 13.41,3.16 13.41,4.81 10.24,7.99 v10.24,14.97 | v10.24,14.97 10.24,15.61 | 10.24,15.61 10.24,20.68 v10.24,23.86 | v10.24,23.86 10.24,24.47 | 10.24,24.47 10.24,32.39 | 10.24,32.39 v10.24,35.14 | v10.24,35.14 10.24,35.29 | v10.24,14.97 10.24,15.61 | v10.24,23.86 10.24,24.47 | v10.24,35.14 10.24,32.39
SDA  (via drill 0.3)
  Top 0.305: U6.13 -8.11,45.45 v-8.11,42.76
  Top 0.406: JP4.3 -6.43,8.1 U1.6 | U2.1 -12.66,8.34 -11.67,7.35 -9.76,7.35 v-9.13,7.99 | U4.SDA -12.21,20.67 -11.77,21.12 v-9.64,21.12 | U5.20 -10.49,33.37 v-10.55,33.31
  Bottom 0.305: v-8.11,42.76 -10.55,40.32 v-10.55,33.31
  Bottom 0.406: JP4.3 -6.59,3.16 -6.59,5.45 -8.81,7.67 | -8.81,7.67 v-9.13,7.99 | v-9.13,7.99 -10.4,9.26 -10.4,19.9 | -10.4,19.9 -10.4,30.21 -10.4,33.16 v-10.55,33.31 | v-9.13,7.99 -8.81,7.67 | -10.4,19.9 -10.4,20.96 -10.25,21.12 v-9.64,21.12
SDA1  (via drill 0.3)
  Top 0.305: U11.13 14.43,45.45 v14.43,42.76
  Top 0.406: JP5.3 16.11,8.1 U8.6 | U7.1 9.88,8.34 10.87,7.35 12.78,7.35 v13.41,7.99 | U9.SDA 10.33,20.67 10.77,21.12 v12.9,21.12 | U12.20 12.05,33.37 v11.99,33.31
  Bottom 0.305: v14.43,42.76 11.99,40.32 v11.99,33.31
  Bottom 0.406: JP5.3 15.95,3.16 15.95,5.45 13.73,7.67 | 13.73,7.67 v13.41,7.99 | v13.41,7.99 12.14,9.26 12.14,19.9 | 12.14,19.9 12.14,30.21 12.14,33.16 v11.99,33.31 | v13.41,7.99 13.73,7.67 | 12.14,19.9 12.14,20.96 12.29,21.12 v12.9,21.12
TB0  (via drill 0.3)  (1 unrouted)
  Top 0.152: -36.22,27.9 -36.22,29.61 v-39.9,33.3 | v-41.76,37.03 -41.76,51.05 -40.39,52.43 -40.39,54.15 -42.9,56.67 -42.9,59.59 -43.56,60.25 -44.91,60.25 -45.52,60.86 -45.52,62
  Bottom 0.152: v-39.9,33.3 -41.76,35.15 v-41.76,37.03 | -47.84,62.23 -45.53,62.23 -45.52,62
TB1  (via drill 0.3)  (1 unrouted)
  Top 0.152: -35.57,27.9 -35.57,29.8 -38.41,32.64 v-38.41,33.17 | v-40.69,37.06 -41.3,37.74 -41.3,50.75 -39.85,52.2 -39.85,54.36 -41.94,56.44 -41.94,60.27 -42.98,61.32 -42.98,62
  Bottom 0.152: v-38.41,33.17 -40.69,35.46 v-40.69,37.06 | -42.98,62 -42.99,61.91 -43.62,61.91 -43.62,60.9 -44.35,60.17 -47.82,60.17 -47.84,60.2
TEST/SBWTCK
  Top 0.152: -46.28,12.09 -46.35,12.15 -47.01,12.51 -47.01,26.14 -46.62,26.54 -46.62,27.9
UV_EN  (via drill 0.3)
  Top 0.406: JP4.5 -11.67,3.16 -11.67,4.81 -15.73,8.87 -15.73,23.86 -12.68,26.91 -10.85,26.91 v-9.03,26.91 | v-5.67,25.08 -5.09,24.49 U3.4 -5.06,24.47 -2.69,24.47 R30.1
  Bottom 0.406: v-9.03,26.91 -7.5,26.91 v-5.67,25.08
UV_EN1  (via drill 0.3)
  Top 0.406: JP5.5 10.87,3.16 10.87,4.81 6.81,8.87 6.81,23.86 9.86,26.91 11.69,26.91 v13.51,26.91 | v16.87,25.08 17.45,24.49 U10.4 17.48,24.47 19.85,24.47 R34.1
  Bottom 0.406: v13.51,26.91 15.04,26.91 v16.87,25.08
V_BT_MS
  Top 0.152: -39.5,42.33 -39.33,42.17 -39.15,41.99 -39.15,39.49 -39.08,39.37 -39.15,39.31 -39.15,38.55 -40.03,37.67 -40.03,35.69 -40.12,35.6
V_BUS_MS
  Top 0.152: -35.4,39.49 -35.4,41.99 -35.57,42.17 -35.69,42.33 | -35.4,39.49 -35.27,39.37 | -35.4,39.49 -35.4,38.92 -37.49,36.83 -39.17,36.83 -39.52,36.47 -39.52,35.66 -39.47,35.6
VCC  (via drill 0.3)  (3 unrouted)
  Top 0.152: -56.84,24.84 -56.84,22.7 | -56.84,22.7 -56.84,21.62 -56.96,21.61 | -56.84,24.84 -53.98,27.7 v-53.98,29.66 -53.98,30.38 -53.27,31.09 -53.27,32.52 -53.17,32.59 -53.09,32.7 -53.09,33.75 -51.63,35.35 v-51.66,35.56 | -56.84,22.7 v-53.83,22.7 | -49.16,31.45 -49.02,31.33 | -32.54,10.01 v-30.93,10.01 | -38.2,25.99 -37.9,26.17 | -38.2,25.99 -38.23,26.04 -38.06,26.04 -37.72,26.12 -37.72,26.39 -36.88,27.23 -36.88,27.89 -36.87,27.9 | -49.66,40.64 -49.66,41.91 -48.39,43.18 | -57.91,58.42 -57.56,58.16 | -52.07,6.49 -49.1,6.49 -49.02,6.57 -48.28,7.31 -48.28,9.7 | -45.61,9.12 -46.74,9.14 -46.99,8.89 | -56.84,24.84 -57.35,25.35 -58.52,25.35 | -57.09,37.71 -55.54,37.71 -54.81,38.43 | -32.2,55.24 -32.09,55.24 | -38.2,25.99 -38.28,25.92 | -58.27,61.92 -58.12,62.08 v-51.31,62.08 | v-51.77,60.27 -56.79,60.27 -57.91,61.39
  Top 0.254: -31.88,20.81 -31.88,20.2 -33.02,19.05 | -52.07,6.49 -52.07,6.99
  Top 0.406: v-28.58,56.13 -28.83,56.39 -30.95,56.39 -32.09,55.24 -32.11,55.23 -32.11,54.48 -31.34,53.72 v-31.34,51.08 | -38.86,54.23 -38.86,53.66 -39.27,53.25 -39.27,51.71 -40.59,50.39 v-40.59,48.26 | -38.86,54.23 -38.86,54.33 -41.05,56.52 -41.05,59.18 v-41.05,59.31 | -32.2,55.24 -32.56,55.24 v-33.1,55.78 | v-34.49,55.85 -37.24,55.85 -38.86,54.23 | -33.35,51.09 -33.24,51.09 v-32.69,50.55 -33.22,50.01 -33.22,45.47 -33.05,45.29 v-33.02,45.29 -31.67,45.29 v-30.61,46.35 | v-33.4,41.66 -32.39,40.64 -31.88,40.64 -28.73,40.64 -28.37,41 -25.45,41 -23.62,42.82 -23.47,42.98 -23.47,48.67 -25.39,50.59 -26.42,50.59 | -33.02,19.05 -34.82,19.05 v-36.01,19.05 -36.01,22.34 v-35.71,22.63 | -38.28,25.92 v-40.04,25.92 | -49.16,31.45 -49.16,34.5 -50.22,35.56 v-51.56,35.56 | v-35.74,23.9 -35.93,23.9 -38.06,26.04 | -45.97,27.9 -45.97,28.79 -45.59,29.16 -43.36,29.16 v-43.31,29.21
  Top 0.61: -45.64,45.85 -45.64,47.57 v-44.63,47.62 | v-51.56,35.56 -51.56,35.51 -54.81,35.51
  Top 1.27: -35.58,5.18 -39.5,1.27 -46.99,1.27 -46.99,8.89 -48.28,9.7 -49.02,10.16 -49.02,15.24 -50.06,16.48 -57.35,16.46 -57.91,13.34 | -57.56,58.16 -56.79,58.17 -56.13,58.17 -50.93,53.98 -51.11,54.1 -45.64,51.13 -45.64,45.85 -48.24,43.2 | -71.25,15.88 -71.3,60.22 -71.3,60.73 -69.55,62.48 -58.83,62.48 -58.27,61.92 -57.91,61.57 -57.91,61.39 -57.91,58.42 | -48.39,43.18 -48.24,43.2 | -48.24,43.2 -49.35,43.2 | -49.35,43.2 -54.33,43.18 -54.81,42.7 -54.81,38.43 -54.81,35.51 -54.81,35.15 -54.81,34.31 -58.47,29.92 -58.47,28.37 -60.05,26.8 | -62.21,29.1 -62.26,27.3 -61.95,27 -60.17,27 -58.52,25.35 | -48.24,43.2 -49.35,43.2
  Top 1.676: -35.58,7.62 -35.58,5.18
  Bottom 0.152: v-53.83,22.7 -52.91,22.7 -52.83,22.64 | v-53.98,29.66 -52.91,29.66 -52.83,29.63 | -52.83,35.98 -52.73,35.92 -52.02,35.92 v-51.66,35.56 v-51.56,35.56 | v-30.93,10.01 -29.86,8.94 -29.76,8.89 | -40.04,24.3 -40.12,24.13 | -36.11,43.78 -36.11,43.81 | -35.4,43.24 -35.93,43.78 -36.11,43.81 | -32.89,43.24 -32.68,43.18 | -40.04,24.12 -40.12,24.13 | v-30.61,46.35 -30.61,46.86 -31.04,47.28 | -36.11,43.81 -36.11,43.78 | -42.78,19.47 -43.31,18.95 | -40.12,24.13 -41.42,24.13 | -40.13,26.04 v-40.04,25.92 | -49.54,60.2 -51.69,60.2 v-51.77,60.27 | -41.92,57.73 -41.92,56.3 -42.05,56.17 | -49.54,62.23 -51.16,62.23 v-51.31,62.08
  Bottom 0.406: v-28.58,56.13 -26.72,57.99 -26.73,60.68 -27.39,60.02 -29.2,60.02 | v-44.63,47.62 -41.22,47.62 v-40.59,48.26 | v-41.05,59.31 -41.9,58.46 -41.95,58.46 -41.95,57.76 -41.92,57.73 | v-33.1,55.78 -34.42,55.78 v-34.49,55.85 | v-32.69,50.55 -31.88,50.55 v-31.34,51.08 | v-33.02,45.29 -32.89,45.16 -32.89,43.24 -35.54,43.24 -36.11,43.81 | -32.68,43.18 -32.68,42.38 v-33.4,41.66 | v-43.31,29.21 -43.31,29.18 v-40.04,25.92 -40.04,24.3 | v-35.71,22.63 -35.71,23.88 v-35.74,23.9 | v-36.01,19.05 -40.34,19.05 -40.77,19.47 -42.78,19.47
  pour Top: -71.88,8.89 -55.37,8.89 -55.37,12.06 -57.28,12.06 -57.28,16.51 -71.88,16.51
  pour Top: -31.88,20.95 -31.24,20.32 -32.51,20.32 -32.51,2.54 -38.08,2.54 -38.08,11.43 -35.05,11.43 -35.05,19.68
VREF  (via drill 0.3)
  Top 0.152: -31.58,35.56 -31.85,35.39 | -33.35,53.04 -33.78,53.47 v-33.78,56.52 -39.32,62.05
  Top 0.406: -31.58,35.56 v-29.08,35.56 | -25.4,47.16 -24.26,46.01 v-24.26,44.45
  Bottom 0.152: -28.6,54.68 -28.49,54.61
  Bottom 0.406: -30.52,56.62 -30.57,56.67 -33.62,56.67 arc90 v-33.78,56.52 | -30.52,56.62 -28.6,54.68 | -28.49,54.61 -24.26,54.61 -23.37,53.72 -23.37,43.56 | v-24.26,44.45 -23.37,43.56 | v-29.08,35.56 -26.8,35.56 -26.42,35.94 -26.42,40.08 -23.37,43.13 -23.37,43.56 | -36.81,59.98 -34.44,59.98 -34.4,60.02 -33.1,60.02 -32.23,59.16 -32.23,58.34 -30.52,56.62

## Text on the board
tNames: Lightning | Lightning | Orientation | Orientation | U4 | U4 | U3 | UV sensor | U3 | UV sensor | Humidity | Humidity | Octanis 1 weather monitor v1 | www.octanis.org | Pressure | Octanis 1 weather monitor v1 | www.octanis.org | Pressure | ACC_LIG_UV_SCL_SDA_GND_3V3 | ACC_LIG_UV_SCL_SDA_GND_3V3
tValues: ML8511 | ML8511 | MCP3425 | MCP3425